# Allegro board RFSG_PCB.brd
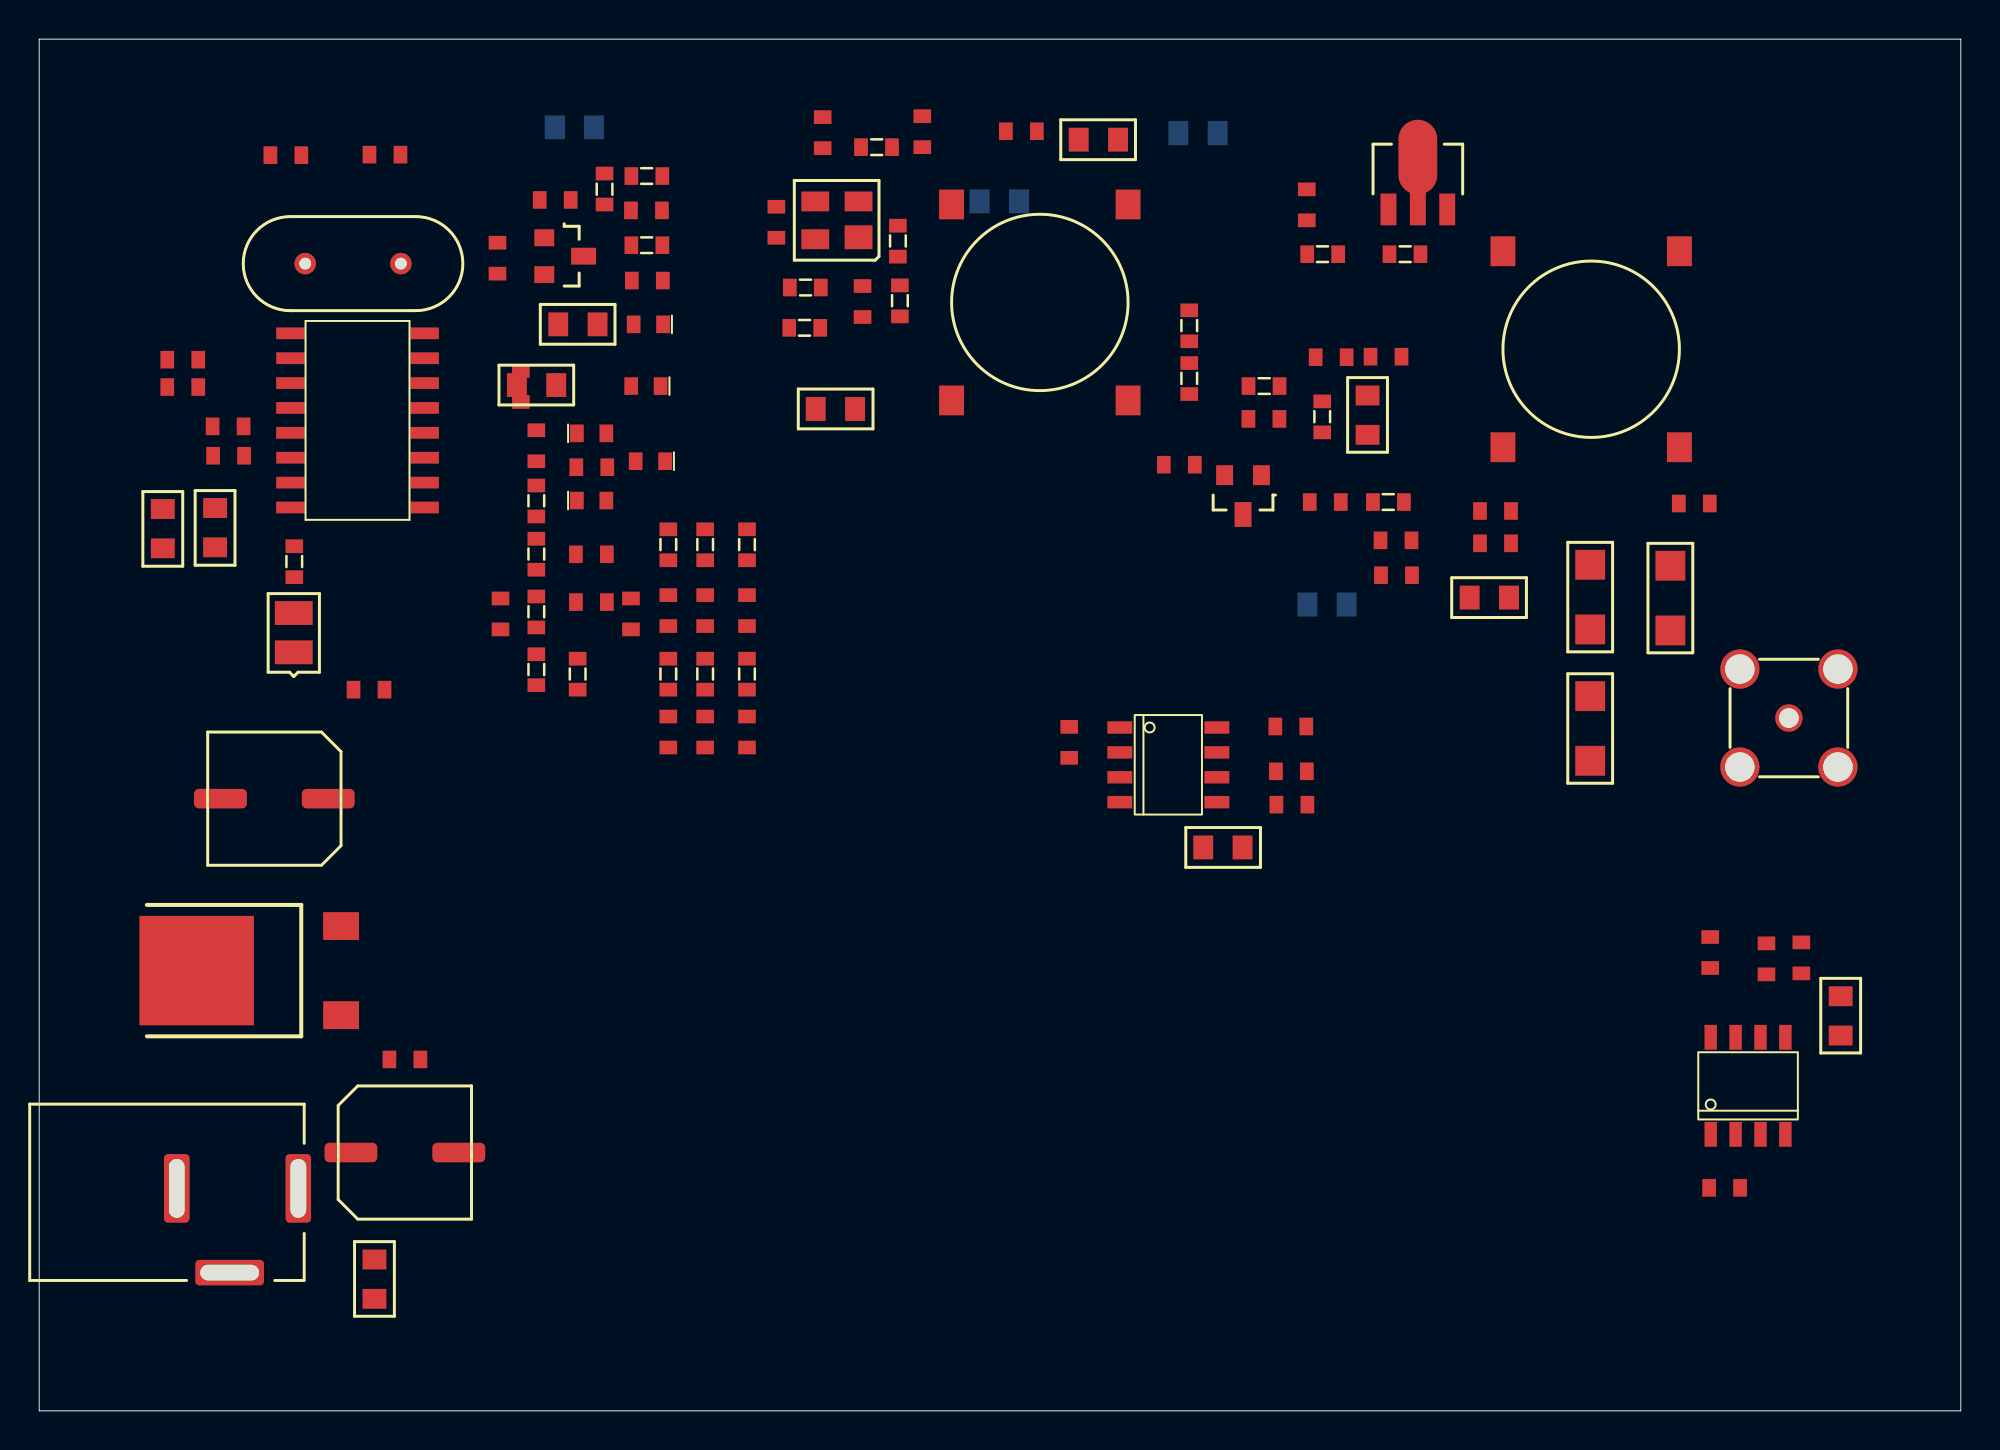
[diagram p0: board, top side]
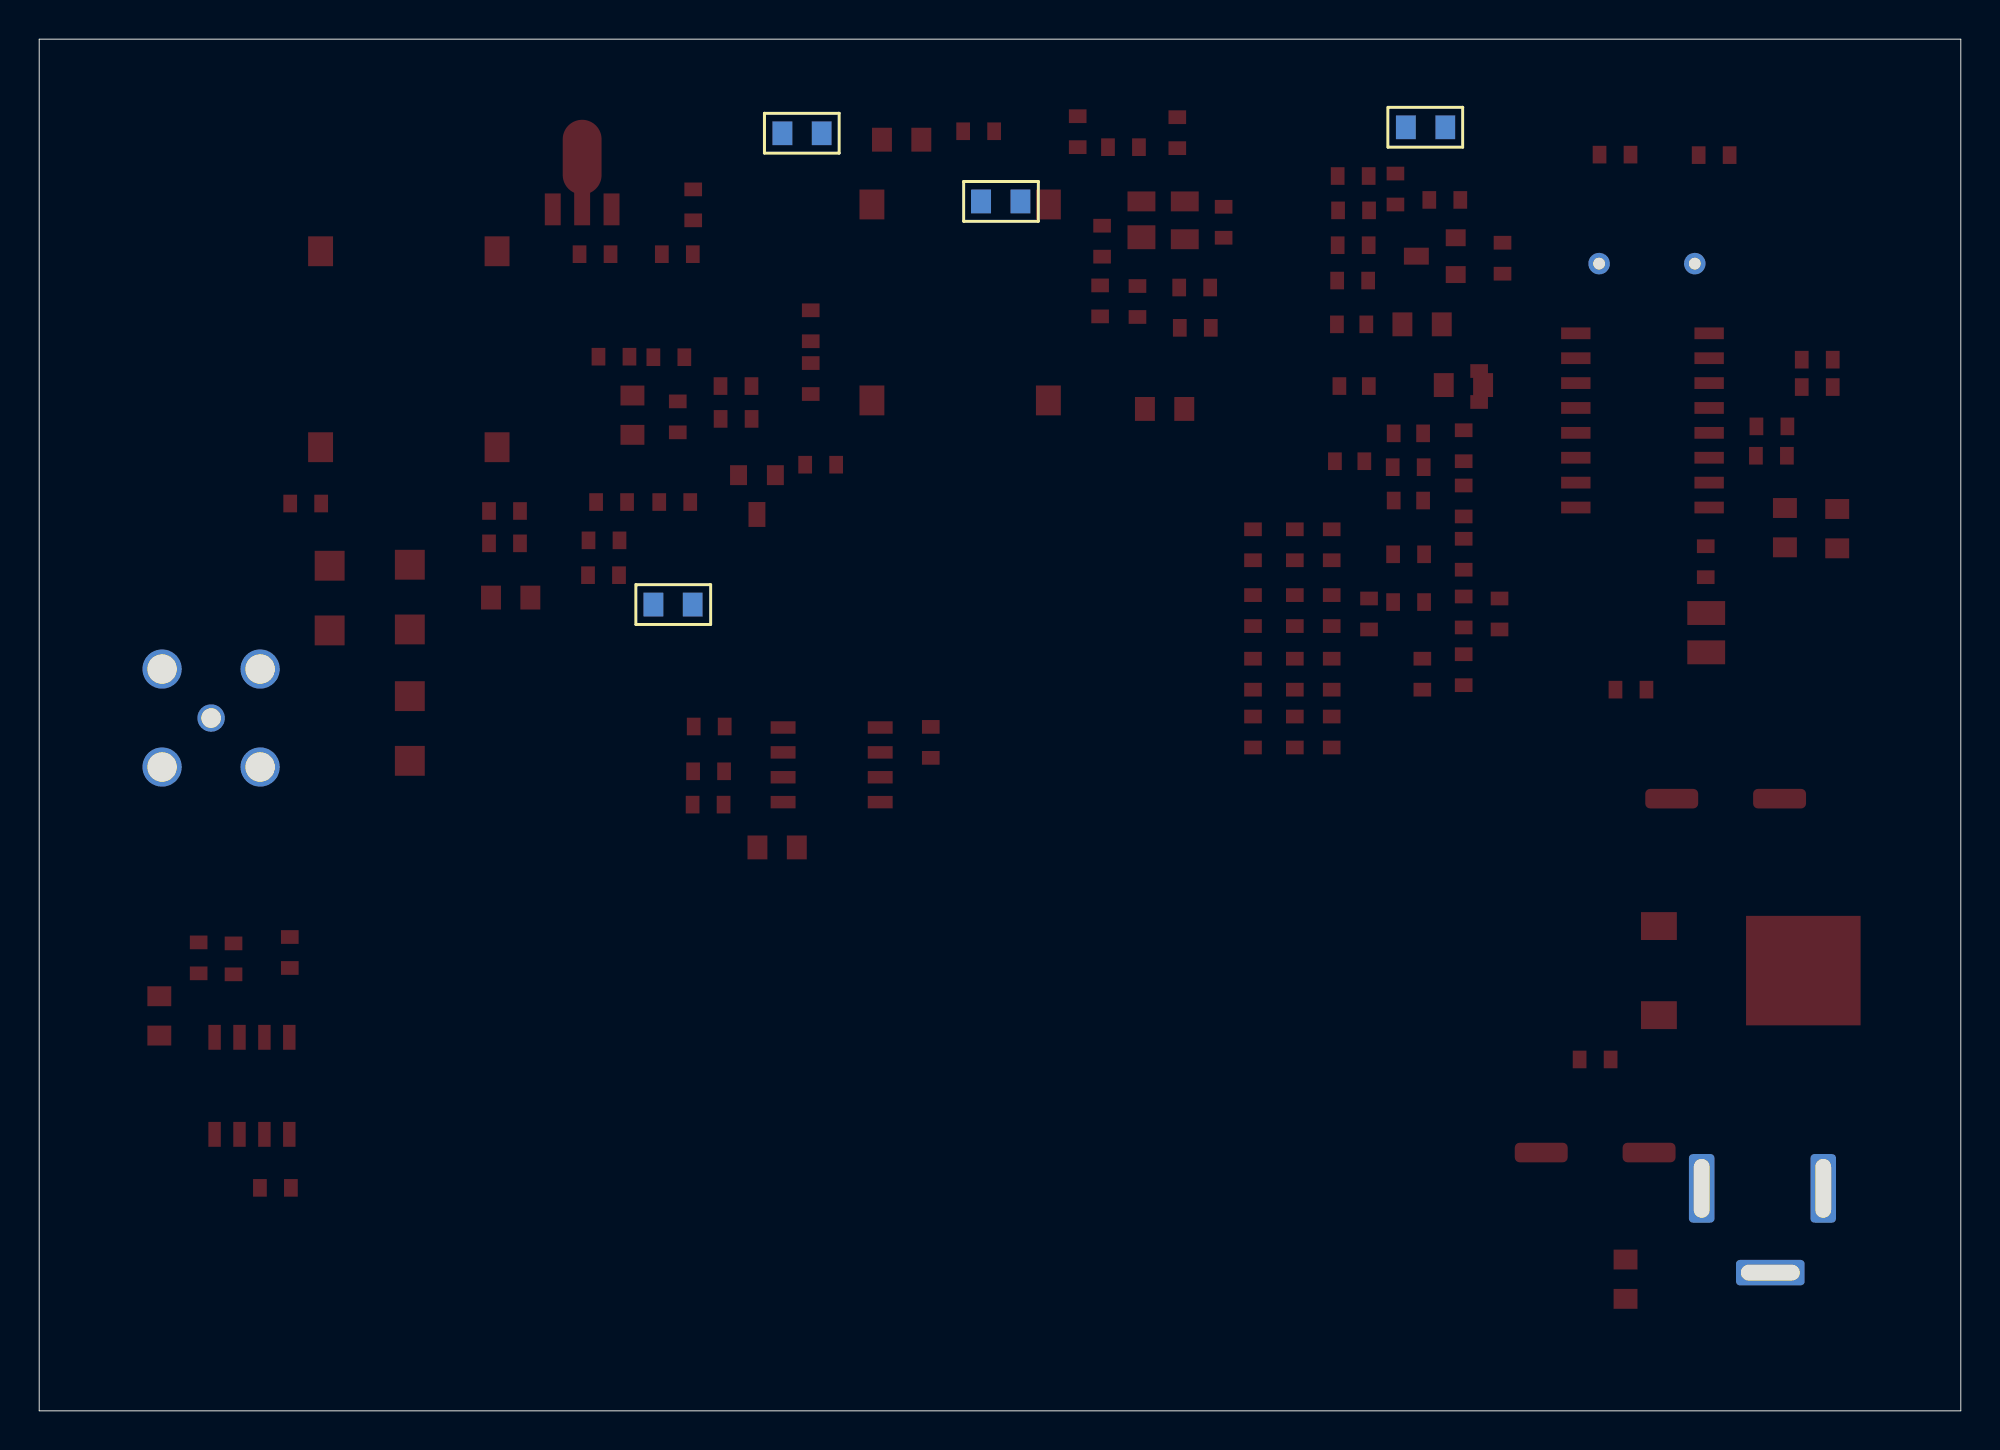
[diagram p1: board, bottom side, seen from below]

Outline 98 x 70 mm; copper layers: TOP, BOTTOM. Coordinates in mm from the lower left corner of the outline.
Outline path: 0,70 98,70 98,0 0,0 0,70

## Design rules (mm)
constraint set DEFAULT: min track width 0.127

## Placement (name value [footprint] x y rotation side)
C1  105  [C0603]  8.84 50.24 0 top
C2  103  [C0603]  6.53 52.25 0 top
C3  105  [C0603]  6.53 53.64 0 top
C4  103  [C0603]  8.87 48.74 0 top
C5  22pF  [C0603]  16.84 64.11 0 top
C6  22pF  [C0603]  11.79 64.08 0 top
C7  105  [C0603]  30.18 39.88 90 top
C8  103  [C0603]  27.37 41.27 0 top
C9  100pF  [C0603]  27.37 43.71 0 top
C10  1000pF  [C0603]  25.35 48.46 90 top
C11  1000pF  [C0603]  24.57 51.48 90 top
C12  20pF  [C0603]  31.8 57.68 180 top
C13  20pF  [C0603]  23.37 59.61 270 top
C14  102  [C0603]  30.18 61.26 0 top
C15  104  [C0603]  27.11 61.8 180 top
C16  20pF  [C0603]  23.52 39.88 90 top
C18  102  [C0603]  39.96 64.44 90 top
C19  102  [C0603]  66.68 53.77 180 top
C20  104  [C0603]  67.9 53.8 0 top
C21  102  [C0603]  63.25 50.62 180 top
C22  102  [C0603]  64.8 46.38 0 top
C23  20pF  [C0603]  37.6 59.87 90 top
C24  102  [C0603]  41.99 57.4 270 top
C25  102  [C0603]  45.04 64.49 90 top
C26  102  [C0603]  50.88 65.3 180 top
C27  102  [C0603]  57.36 48.28 0 top
C30  102  [C0603]  75.06 45.92 180 top
C31  100pF  [C0603]  75.06 44.27 180 top
C32  102  [C0603]  64.65 60.76 90 top
C33  100pF  [C0603]  68.43 42.65 0 top
C34  1.5pF  [C0603]  83.62 46.3 0 top
C35  102  [C0603]  52.53 33.32 90 top
C36  102  [C0603]  64.62 34.92 180 top
C37  102  [C0603]  63.1 30.94 0 top
C38  104  [C0603]  63.07 32.64 0 top
C39  102  [C0603]  85.22 24.18 270 top
C40  104  [C0603]  89.87 22.33 90 top
C41  102  [C0603]  88.09 22.27 90 top
C42  102  [C0603]  86.74 11.38 180 top
C43  102  [C0603]  68.41 44.42 0 top
C44  12pF  [C0603]  28.97 48.16 180 top
C45  103  [C0603]  32.08 41.63 270 top
C46  103  [C0603]  33.96 41.63 270 top
C47  103  [C0603]  36.1 41.63 270 top
C48  103  [C0603]  32.08 35.43 270 top
C49  103  [C0603]  33.96 35.43 270 top
C50  103  [C0603]  36.1 35.43 270 top
C51  220uF/16v  [SMCT6_3X7_7MM]  11.99 31.24 0 top
C52  220uF/25v  [SMCT6_3X7_7MM]  18.65 13.18 180 top
C53  105  [C0603]  16.03 36.8 0 top
C54  105  [C0603]  17.86 17.93 0 top
D3  LED  [SMD080521]  12.98 40.72 90 top
D4  KV1417  [SMD0603]  28.17 49.88 0 top
D5  HSC277  [SMD0603]  31.17 48.46 180 top
D6  KV1417  [SMD0603]  28.17 46.46 0 top
D8  HSC277  [SMD0603]  30.94 52.3 180 top
D9  HSC277  [SMD0603]  31.07 55.45 180 top
FB1  Feber  [SML0805]  6.3 44.02 90 top
FB2  Feber  [SML0805]  8.97 44.07 90 top
FB3  Feber  [SML0805]  28.3 65.51 180 bottom
FB4  Feber  [SML0805]  41.61 51.13 180 top
FB5  Feber  [SML0805]  60.1 65.2 180 bottom
FB6  Feber  [SML0805]  47.96 61.72 0 bottom
FB7  Feber  [SML0805]  64.67 41.15 0 bottom
FB8  Feber  [SML0805]  61.37 28.75 180 top
FB9  Feber  [SML0805]  91.88 21.16 270 top
FB10  Feber  [SML0805]  17.1 7.72 270 top
J2  DC-5mm  [DC5MMSOCKET]  7.01 11.35 0 top
J3  SMA-5PIN  [SMA-KWE]  89.23 35.36 0 top
L1  56nH/SM  [SML0805]  24.36 52.35 0 top
L2  360nH/SM  [SML0805]  67.75 51.81 270 top
L3  10uH/SM  [SML0805]  53.01 64.87 0 top
L4  RFC  [SML0805]  72.95 41.5 0 top
L5  180nH/SM  [SML0805]  26.47 55.45 0 top
Q1  BF998  [SMSOT1431234]  41.79 59.89 90 top
Q3  2sc3356  [SMSOT23213]  25.76 57.99 270 top
Q5  2sc3356  [SMSOT23213]  60.46 47.75 180 top
Q6  2sk3475  [SMSOT89123]  68.81 61.31 0 top
R1  1K  [R0603]  13.01 42.54 90 top
R2  1K  [R0603]  25.35 37.03 90 top
R3  1K  [R0603]  25.35 39.98 90 top
R4  2K  [R0603]  25.35 42.92 90 top
R5  1K  [R0603]  27.46 36.8 90 top
R6  100K  [R0603]  25.35 45.64 90 top
R7  1K  [R0603]  31.78 59.49 180 top
R8  12k  [R0603]  31.78 63.02 180 top
R9  10k  [R0603]  28.83 63.14 270 top
R12  360R  [R0603]  43.89 55.85 90 top
R13  200R  [R0603]  65.43 49.94 90 top
R14  3.3k  [R0603]  58.65 54.58 90 top
R15  1.5k  [R0603]  58.65 51.89 90 top
R16  50R  [R0603]  61.67 52.3 0 top
R17  100K  [R0603]  38.28 57.33 0 top
R18  150k  [R0603]  39.83 55.27 180 top
R19  1.8k  [R0603]  43.79 58.9 90 top
R20  100K  [R0603]  41.91 64.49 0 top
R22  3.6k  [R0603]  66.25 59.03 180 top
R23  50R/1W  [SMR1206]  79.1 39.88 90 top
R24  50R/1W  [SMR1206]  83.19 39.83 90 top
R25  51R/1W  [SMR1206]  79.1 33.17 90 top
R26  50R/1W  [R0603]  69.6 46.38 180 top
R27  3K  [R0603]  32.08 43.41 90 top
R28  3K  [R0603]  36.1 43.41 90 top
R29  3K  [R0603]  33.96 43.41 90 top
R30  100R  [R0603]  32.08 36.8 90 top
R31  100R  [R0603]  33.96 36.8 90 top
R32  100R  [R0603]  36.1 36.8 90 top
RT1  NTC-1k  [R0603]  68.86 59.03 0 top
T1  4:1  500nH  [T-10X10-4P]  51.03 56.56 270 top
T2  1:2 1uH  [T-10X10-4P]  79.15 54.18 270 top
U1  MB1504_PLL  [FPT-16P-M06]  16.23 50.54 0 top
U2  AD8307  [SOIC8]  57.59 32.97 0 top
U3  AD8307  [SOIC8]  87.15 16.59 90 top
U4  CJ78M05TO252  [TO252123DPAK]  15.4 20.24 180 top
Y1  8.000000Mhz/SM  [Y-49S]  16.01 58.55 0 top

## Library data of the parts
C1-C16 C18-C27 C30-C50 C53 C54 = CAP NP
C51 C52 = CAP POL
D3 = LED
D4 D6 = DIODE VARACTOR
D5 D8 D9 = DIODE
FB1-FB10 = Feber
J2 = CONN JACK PWR
J3 = SMA-5PIN
L1 L2 L5 = INDUCTOR
L3 L4 = INDUCTOR IRON
Q1 = BF998
Q3 Q5 = MMBT3904/SOT
Q6 = 2sk3475
R1-R9 R12-R20 R22-R32 = R
RT1 = NTC
T1 T2 = TRANSFORMER
U1 = MB1504
U2 U3 = AD8307
U4 = 78XX/SM
Y1 = CRYSTAL/SM

## Footprints (pads in the part's own frame, mm; a bottom-side part is the same pattern mirrored in y, then rotated)
C0603
  rect 0.7x0.9 smd: 1(0,0) 2(1.58,0)
DC5MMSOCKET
  rrect 1.3x3.5 hole 0.8x3: 1(0,0) 2(6.2,0)
  rrect 3.5x1.3 hole 3x0.8: 3(2.7,-4.3)
FPT-16P-M06
  rect 1.5x0.6 smd: 1(-3.4,4.445) 2(-3.4,3.175) 3(-3.4,1.905) 4(-3.4,0.635) 5(-3.4,-0.635) 6(-3.4,-1.905) 7(-3.4,-3.175) 8(-3.4,-4.445) 9(3.4,-4.445) 10(3.4,-3.175) 11(3.4,-1.905) 12(3.4,-0.635) 13(3.4,0.635) 14(3.4,1.905) 15(3.4,3.175) 16(3.4,4.445)
R0603
  rect 0.7x0.9 smd: 1(0,0) 2(1.58,0)
SMA-KWE
  round 1.4 hole 1: 1(0,0)
  round 2 hole 1.5: 2(-2.5,2.5) 3(2.5,2.5) 4(-2.5,-2.5) 5(2.5,-2.5)
SMCT6_3X7_7MM
  rrect 2.7x1 smd: 1(2.75,0) 2(-2.75,0)
SMD0603
  rect 0.7x0.9 smd: 1(-0.75,0) 2(0.75,0)
SMD080521
  rect 1.219x1.93 smd: 1(0,0) 2(-2.007,0)
SML0805
  rect 1.016x1.219 smd: 1(0,0) 2(2.007,0)
SMR1206
  rect 1.524x1.524 smd: 1(0,0) 2(3.302,0)
SMSOT23213
  rect 0.864x1.016 smd: 1(0,0) 2(-1.88,0)
  rect 0.864x1.27 smd: 3(-0.94,2.007)
SMSOT89123
  rect 0.813x1.626 smd: 1(0,0) 3(2.997,0)
  rect 0.813x2.388 smd: 2(1.499,0.381)
SMSOT1431234
  rect 1.219x1.422 smd: 1(0,0)
  rect 1.016x1.422 smd: 2(1.829,0) 3(1.829,2.21) 4(-0.102,2.21)
SOIC8
  rect 1.27x0.635 smd: 1(-2.477,1.905) 2(-2.477,0.635) 3(-2.477,-0.635) 4(-2.477,-1.905) 5(2.477,-1.905) 6(2.477,-0.635) 7(2.477,0.635) 8(2.477,1.905)
T-10X10-4P
  rect 1.524x1.27 smd: 1(-5,4.5) 4(-5,-4.5) 5(5,4.5) 8(5,-4.5)
TO252123DPAK
  rect 1.829x1.422 smd: 1(0,0) 3(0,-4.445)
  rect 5.842x5.588 smd: 2(7.62,-2.223)
Y-49S
  round 1.1 hole 0.6: 1(-2.44,0) 2(2.44,0)

## Nets
VCC_5V: C51.1 C53.1 D3.2 FB2.1 FB3.2 FB8.2 FB9.2 U4.3(VOUT)
VCC_7V: FB1.1
VCC_12V: C52.1 C54.1 FB4.2 FB5.2 FB7.1 FB10.1 R18.2 U4.1
VCC_PWR: FB10.2 J2.2
0: C1.2 C2.2 C3.2 C4.2 C5.1 C6.1 C7.2 C8.2 C9.2 C12.1 C14.2 C15.2 C18.2 C19.2 C20.2 C21.2 C24.2 C25.2 C26.2 C30.2 C31.2 C32.2 C33.2 C34.2 C35.1 C37.2 C38.2 C40.2 C41.2 C42.1 C43.2 C45.2 C46.2 C47.2 C48.2 C49.2 C50.2 C51.2 C52.2 C53.2 C54.2 D5.1(K) D6.2 D8.1(K) D9.1(K) J2.1 J2.3 J3.2 J3.3 J3.4 J3.5 Q6.2(S) R7.1 R8.1 R12.1 R15.1 R16.1 R17.1 R25.1 RT1.2 T1.8 T2.8 U1.6 U2.2 U3.2 U4.2
AMP_IN: C22.2 Q6.1 R22.1 R26.2 RT1.1
CAP_ADD: C48.1 R30.1
L_56NH_EN: C49.1 R31.1
L_180NH_EN: C50.1 R32.1
MB1504_CLK: U1.9
MB1504_DATA: U1.10
MB1504_LE: U1.11
RF_LEVEL_DET_OUT_50R: U2.4
RF_LEVEL_DET_OUT_TARGET: U3.4
VAGC: FB6.2
N00739: C2.1 C3.1 FB1.2 U1.3(VP)
N00751: C1.1 C4.1 FB2.2 U1.4
N01952: C6.2 U1.1 Y1.1
N01959: C5.2 U1.2 Y1.2
N02788: R1.2 U1.7
N03150: R2.2 R3.1 R5.2
N03154: C8.1 R3.2 R4.1
N003200: D3.1(CATHODE) R1.1
N03323: C9.1 R4.2 R6.1
N03390: R2.1 U1.5
N03615: C10.1 C44.2 D4.1(CATHODE) D6.1(CATHODE) R6.2
N03716: C10.2 C11.1 L1.1 L5.1
N04288: C11.2 C13.2 Q3.1 R8.2 R9.1
N04575: C12.2 C13.1 C16.1 C23.2 Q3.2(E) R7.2
N05777: C14.1 C15.1 FB3.1 Q3.3 R9.2
N07023: C16.2 U1.8
N13678: C19.1 C20.1 FB4.1 L2.1 R13.2 R14.2
N13830: C22.1 L2.2 Q5.3 R13.1
N13858: C27.2 Q5.1 R14.1 R15.2
N13916: C21.1 Q5.2(E) R16.2
N15516: C23.1 Q1.4 R17.2 R18.1
N16150: C24.1 Q1.1(SOURCE) R12.2 R19.1
N23186: C18.1 Q1.3 R20.1
N23276: C25.1 FB6.1 R20.2
N23435: FB5.1 L3.1 R19.2
N24515: C26.1 L3.2 T1.1
N26615: C27.1 T1.5
N27552: Q1.2 T1.4
N29922: Q6.3 T2.4
N30079: C30.1 C31.1 L4.2 T2.1
N30907: C32.1 C33.1 FB7.2 L4.1 R22.2
N32732: C34.1 R23.2 R24.2 T2.5
N33342: C36.1 R23.1 R25.2
N33404: C39.1 J3.1 R24.1
N35694: C35.2 U2.1
N35698: C36.2 U2.8
N36112: C37.1 C38.1 FB8.1 U2.6 U2.7(VPS)
N37316: C40.1 C41.1 FB9.1 U3.6 U3.7(VPS)
N37372: C39.2 U3.8
N37484: C42.2 U3.1
N47507: D8.2 L1.2 R29.2
N47511: D9.2 L5.2 R28.2
N49167: C7.1 R5.1
N49568: C44.1 D4.2 D5.2 R27.2
N51752: C45.1 R27.1 R30.2
N51756: C46.1 R29.1 R31.2
N51760: C47.1 R28.1 R32.2
N85574: C43.1 R26.1

Pads without a net: U1 12 13 14 15 16; U2 3 5; U3 3 5

## Copper pours and planes (outline as drawn; the poured copper is in the pictures)
Net_2 on TOP (solid shape): 69.32,64.9 70.31,65.89 71.3,64.9 71.3,63.07 70.31,62.08 69.32,63.07
